# EAGLE board v1draft2 (EAGLE 7.3.0)
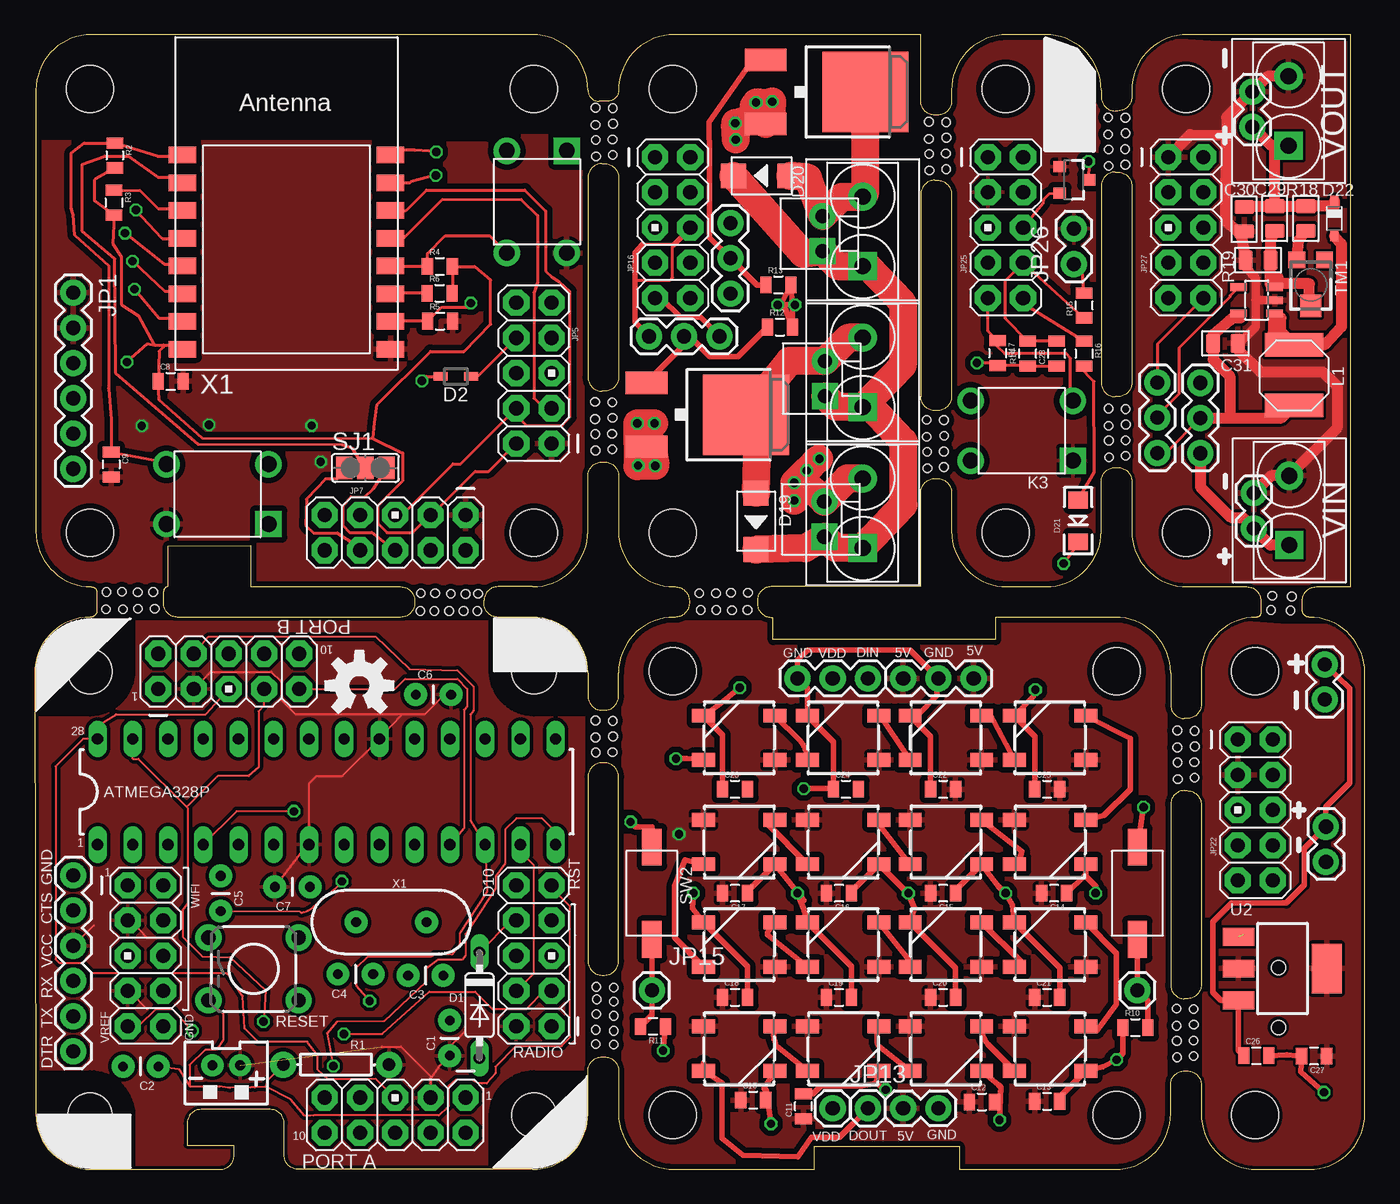
[diagram p0: board, top side]
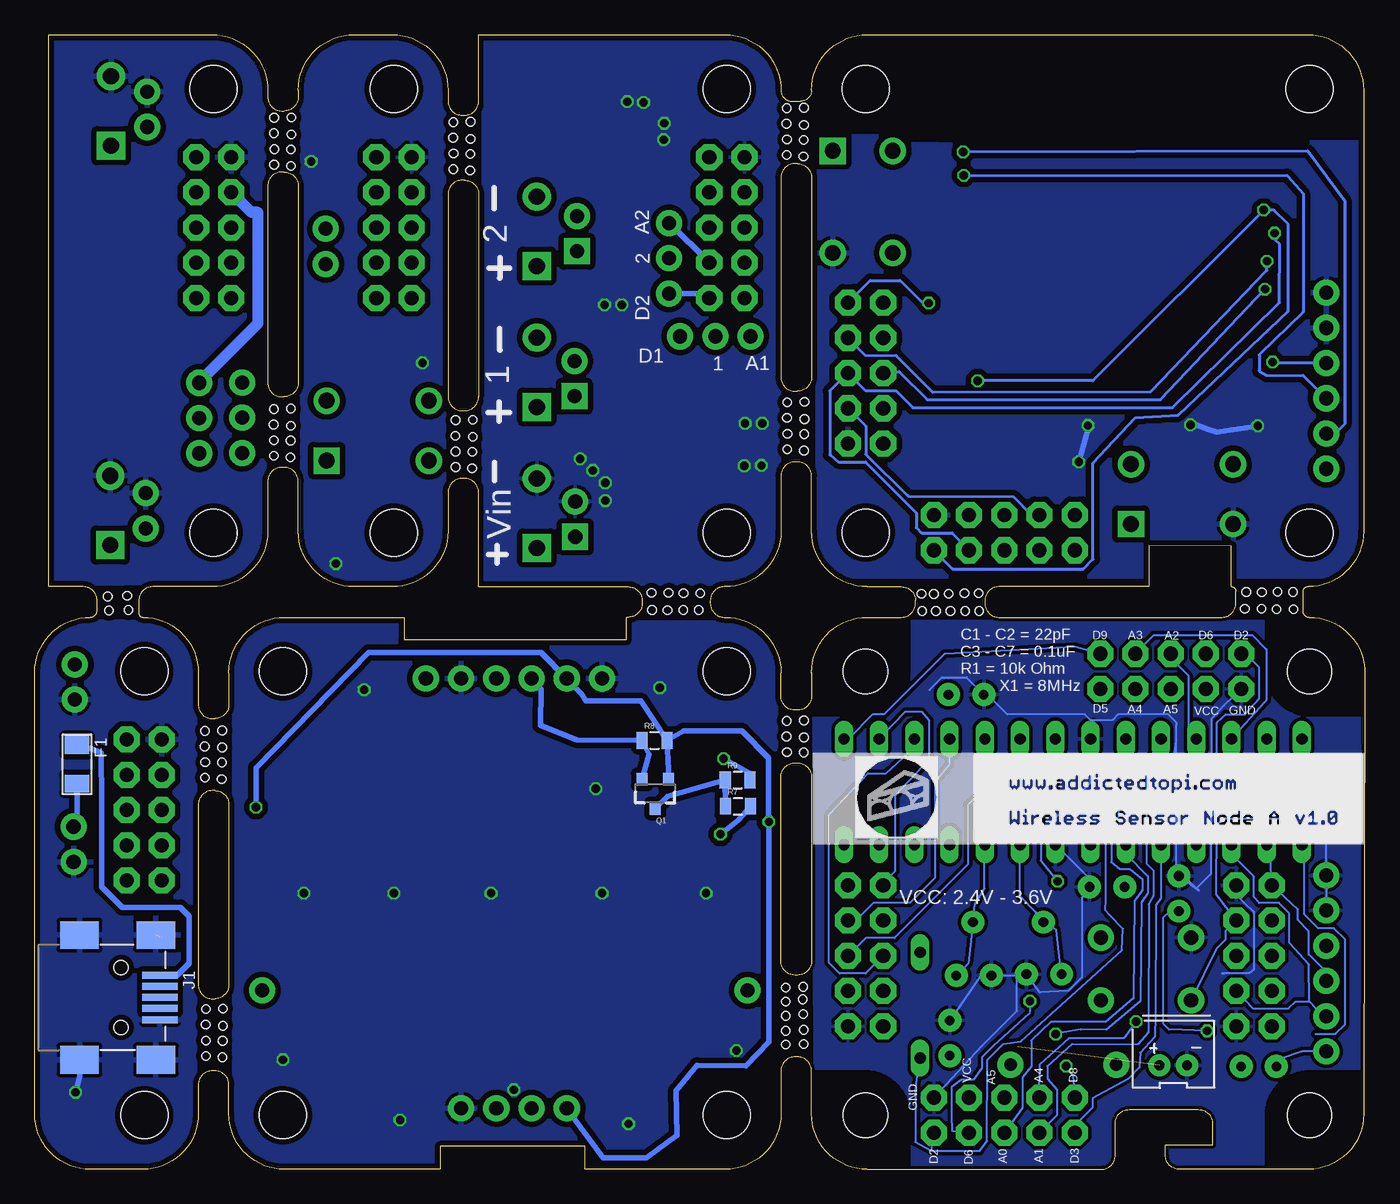
[diagram p1: board, bottom side, seen from below]

Size 95.89 x 81.8 mm. Coordinates in mm from the lower left corner, seen from the top.
Outline: 0.09,77.8 0.09,46 arc90 4.09,42 arc-90 4.49,41.6 4.49,40.29 arc-90 4,39.8 arc90 0,35.79 0.08,3.99 arc90 4.08,0 13.37,0 arc90 14.37,1 14.37,1.74 10.99,1.74 10.99,3.31 arc-90 11.99,4.31 16.99,4.31 arc-90 17.99,3.31 17.99,1 arc90 18.99,0 35.89,0 arc90 39.89,4 39.89,7.1 arc-90 40.89,8.1 41.09,8.1 arc-90 42.09,7.1 42.09,4 arc90 46.09,0 56.2,0.01 56.2,1.66 66.65,1.65 66.65,0 77.89,0 arc90 81.89,4 81.89,6.1 arc-90 82.89,7.1 83.09,7.1 arc-90 84.09,6.1 84.09,4 arc90 88.09,0 91.89,0 arc90 95.89,4 95.89,35.8 arc90 91.89,39.8 arc-90 91.39,40.3 91.39,41 arc-90 92.39,42 94.89,42 94.89,81.8 83.09,81.8 arc90 79.09,77.8 79.09,77.3 arc-90 78.09,76.3 77.89,76.3 arc-90 76.89,77.3 76.89,77.8 arc90 72.89,81.8 70.09,81.8 arc90 66.09,77.8 66.09,77 arc-90 65.09,76 64.89,76 arc-90 63.89,77 63.89,81.8 46.09,81.8 arc90 42.09,77.8 arc-90 41.29,77 40.69,77 arc-90 39.89,77.8 arc90 35.89,81.8 4.09,81.8 arc90 0.09,77.8
Outline: 9.63,42 arc90 9.29,41.66 9.29,40.8 arc90 10.29,39.8 26.39,39.8 arc90 27.39,40.8 27.39,41 arc90 26.39,42 15.56,42 15.56,44.96 9.63,44.93 9.63,42
Outline: 35.89,42 33.39,42 arc90 32.39,41 32.39,40.8 arc90 33.39,39.8 35.89,39.8 arc-90 39.89,35.8 39.89,34.1 arc90 40.89,33.1 41.09,33.1 arc90 42.09,34.1 42.09,35.8 arc-90 46.09,39.8 46.19,39.8 arc90 47.19,40.8 47.19,41 arc90 46.19,42 46.09,42 arc-90 42.09,46 42.09,50 arc90 41.09,51 40.89,51 arc90 39.89,50 39.89,46 arc-90 35.89,42
Outline: 40.89,72.5 41.09,72.5 arc-90 42.09,71.5 42.09,57.1 arc-90 41.09,56.1 40.89,56.1 arc-90 39.89,57.1 39.89,71.5 arc-90 40.89,72.5
Outline: 40.89,14 41.09,14 arc90 42.09,15 42.09,28.3 arc90 41.09,29.3 40.89,29.3 arc90 39.89,28.3 39.89,15 arc90 40.89,14
Outline: 82.89,27.3 83.09,27.3 arc-90 84.09,26.3 84.09,13.3 arc-90 83.09,12.3 82.89,12.3 arc-90 81.89,13.3 81.89,26.3 arc-90 82.89,27.3
Outline: 81.89,35.8 81.89,33.5 arc90 82.89,32.5 83.09,32.5 arc90 84.09,33.5 84.09,35.8 arc-90 88.09,39.8 arc90 88.39,40.1 88.39,41 arc90 87.39,42 83.09,42 arc-90 79.09,46 79.09,49.6 arc90 78.09,50.6 77.89,50.6 arc90 76.89,49.6 76.89,46 arc-90 72.89,42 70.09,42 arc-90 66.09,46 66.09,48.8 arc90 65.09,49.8 64.89,49.8 arc90 63.89,48.8 63.89,42 53.09,42 arc90 52.09,41 52.09,40.8 arc90 53.09,39.8 53.24,39.8 53.24,38.18 69.27,38.18 69.27,39.8 77.89,39.8 arc-90 81.89,35.8
Outline: 65.09,54.7 64.89,54.7 arc-90 63.89,55.7 63.89,70.3 arc-90 64.89,71.3 65.09,71.3 arc-90 66.09,70.3 66.09,55.7 arc-90 65.09,54.7
Outline: 77.89,71.9 78.09,71.9 arc-90 79.09,70.9 79.09,56.7 arc-90 78.09,55.7 77.89,55.7 arc-90 76.89,56.7 76.89,70.9 arc-90 77.89,71.9
Copper layers (1*16): Top 0.035mm / dielectric 1.5mm / Bottom 0.035mm
Design rules "dirt_cheap_dirty_boards.v1": minimum track width 5mil, minimum drill 12mil, track to track 5mil, track to pad 5mil, pad to pad 5mil, via to via 5mil, smd to smd 0mil, copper to edge 10mil, drill to drill 10mil, minimum pad ring 10mil, minimum via ring 6mil, stop-mask expansion 2mil, vias tented up to drill 25mil, thermal gap 10mil
Net classes: 0 default: clearance 0.205 mm
Holes 3.4 mm at 3.99,45.9 35.99,77.9 35.99,45.9 3.99,77.9 45.99,3.9 45.99,35.9 77.99,35.9 77.99,3.9 45.99,77.9 45.99,45.9 87.99,35.9 87.99,3.9 69.99,77.9 69.99,45.9 82.99,77.9 82.99,45.9
Holes 0.6 mm at 5.17,41.62 6.29,41.64 7.43,41.61 8.55,41.62 5.14,40.38 6.37,40.38 7.45,40.41 8.65,40.42 27.84,41.53 28.87,41.53 30.01,41.5 31.07,41.47 31.97,41.5 27.81,40.25 28.81,40.25 29.88,40.25 30.92,40.25 31.92,40.25 40.46,9.02 40.46,10.05 40.49,11.19 40.52,12.25 40.49,13.15 41.74,8.99 41.74,9.99 41.74,11.06 41.74,12.1 41.74,13.1 51.39,40.32 50.27,40.3 49.13,40.33 48.01,40.32 51.42,41.56 50.19,41.56 49.11,41.53 47.91,41.52 41.63,55.29 41.65,54.17 41.62,53.03 41.63,51.91 40.39,55.32 40.39,54.09 40.42,53.01 40.43,51.81 41.67,76.5 41.69,75.38 41.66,74.24 41.67,73.12 40.43,76.53 40.43,75.3 40.46,74.22 40.47,73.02 65.7,75.49 65.72,74.37 65.69,73.23 65.7,72.11 64.46,75.52 64.46,74.29 64.49,73.21 64.5,72.01 78.62,75.81 78.64,74.69 78.61,73.55 78.62,72.43 77.38,75.84 77.38,74.61 77.41,73.53 77.42,72.33 78.65,54.81 78.67,53.69 78.64,52.55 78.65,51.43 77.41,54.84 77.41,53.61 77.44,52.53 77.45,51.33 65.55,54.01 65.57,52.89 65.54,51.75 65.55,50.63 64.31,54.04 64.31,52.81 64.34,51.73 64.35,50.53 83.55,11.55 83.57,10.43 83.54,9.29 83.55,8.17 82.31,11.58 82.31,10.35 82.34,9.27 82.35,8.07 83.61,31.61 83.63,30.49 83.6,29.35 83.61,28.23 82.37,31.64 82.37,30.41 82.4,29.33 82.41,28.13 41.67,32.33 41.69,31.21 41.66,30.07 40.43,32.36 40.43,31.13 40.46,30.05 89.13,40.32 90.53,40.28 90.62,41.3 89.22,41.36
tRestrict: 16 lines
bRestrict: 16 lines

## Footprints (pad centres in the part's own frame; a part is rotated, then mirrored left to right if it is on the bottom)
CAP-PTH-SMALL = drill 0.7 pad 1.651: 1 0,0; 2 2.54,0
0805 = smd 0.8 x 1.2: 1 -0.9,0; 2 0.9,0
C0805 = smd 1.397 x 1.016: 1 0,0.889; 2 0,-0.889
DO35-7 = drill 0.813 long: A 3.81,0; C -3.81,0
SOD323 = smd 1 x 0.6: 1 -1.1,0; 2 1.1,0
WS2812B = smd 1.651 x 1: 1 -2.577,1.6; 2 -2.577,-1.6; 3 2.577,-1.6; 4 2.577,1.6
DO-214AC = smd 1.8 x 1.77: 1 -2.042,0; 2 2.042,0
LED-1206 = smd 1.2 x 1.4: A -1.5,0; C 1.5,0
SOD323_ST = smd 0.8 x 0.6: A 1.25,0; C -1.25,0
F1206 = smd 1.27 x 1.778: 1 -1.397,0; 2 1.397,0
SOT-23-5 = smd 0.55 x 1.2: 1 -0.95,-1.3; 2 0,-1.3; 3 0.95,-1.3; 4 0.95,1.3; 5 -0.95,1.3
MINIUSB5+4P-SMD-0.8-90D = smd 2.54 x 0.508: 1 0.381,-1.6; 2 0.381,-0.8; 3 0.381,0; 4 0.381,0.8; 5 0.381,1.6 | smd 2.794 x 2: P$1 6.175,4.5; P$2 6.175,-4.5; P$3 0.675,4.5; P$4 0.675,-4.5 | hole 1.016: 3.175,-2.159; 3.175,2.159
1X06 = drill 1.016 pad 1.88: 1 0,0; 2 2.54,0; 3 5.08,0; 4 7.62,0; 5 10.16,0; 6 12.7,0
AVR_ICSP = drill 1.016 pad 1.88 octagon: 1 -1.27,5.08; 2 1.27,5.08; 3 -1.27,2.54; 4 1.27,2.54; 5 -1.27,0; 6 1.27,0; 7 -1.27,-2.54; 8 1.27,-2.54; 9 -1.27,-5.08; 10 1.27,-5.08
JST-2-PTH-VERT = drill 0.7 pad 1.6: 1 -1,-0.55; 2 1,-0.55
1X03 = drill 1.016 pad 1.88: 1 0,0; 2 2.54,0; 3 5.08,0
1X01 = drill 1.016 pad 1.88: 1 0,0
1X02 = drill 1.016 pad 1.88: 1 0,0; 2 2.54,0
MOLEX-1X2 = drill 1.016 pad 1.88 square: 1 0,0 | drill 1.016 pad 1.88: 2 2.54,0
SW4-6.0X6.0X5.0MM = drill 1.143 pad 1.905 square: 1 -3.683,2.159 | drill 1.143 pad 1.905: 2 -3.683,-2.159; 3 3.683,-2.159; 4 3.683,2.159
SMD-2P-5.0X5.0X2.0MM = smd 4.2 x 1.7: 1 0,2.175; 2 0,-2.175
SOT23-3 = smd 0.8 x 0.9: 1 -0.95,-1; 2 0.95,-1; 3 0,1.1
DPAK = smd 3 x 1.6: 1 0,-2.3; 2 0,2.3 | smd 6.2 x 5.8: 3 -7.18,0
AXIAL-0.3 = drill 0.9 pad 1.88: P$1 -3.81,0; P$2 3.81,0
R0805 = smd 1.397 x 1.016: 1 0,0.889; 2 0,-0.889
TACTILE-PTH = drill 1.016 pad 1.88: 1 -3.251,2.261; 2 3.251,2.261; 3 -3.251,-2.261; 4 3.251,-2.261
PAD-JUMPER-3-NO_YES_SILK_FULL_BOX = smd 1.168 x 1.6: 1 -1.524,0; 2 0,0; 3 1.524,0
SW2-4.0-6.0X3.0X2.5MM = smd 2.65 x 1.4: 1 -3.325,0; 2 3.325,0
TC33X = smd 1.2 x 1.2: 1 -1,-1.825; 3 1,-1.825 | smd 1.5 x 1.6: 2 0,1.5
DIL28-3 = drill 0.813 long: 1 -16.51,-3.81; 2 -13.97,-3.81; 3 -11.43,-3.81; 4 -8.89,-3.81; 5 -6.35,-3.81; 6 -3.81,-3.81; 7 -1.27,-3.81; 8 1.27,-3.81; 9 3.81,-3.81; 10 6.35,-3.81; 11 8.89,-3.81; 12 11.43,-3.81; 13 13.97,-3.81; 14 16.51,-3.81; 15 16.51,3.81; 16 13.97,3.81; 17 11.43,3.81; 18 8.89,3.81; 19 6.35,3.81; 20 3.81,3.81; 21 1.27,3.81; 22 -1.27,3.81; 23 -3.81,3.81; 24 -6.35,3.81; 25 -8.89,3.81; 26 -11.43,3.81; 27 -13.97,3.81; 28 -16.51,3.81
SOT-223 = smd 1.27 x 2.286: 1 -2.286,-3.175; 2 0,-3.175; 3 2.286,-3.175 | smd 3.556 x 2.159: TER 0,3.175
DP4040_V1_NOLINES = hole 3.2: -16,-16; 16,-16; 16,16; -16,16
H2-5.0-10.5X8.0MM = drill 1.168 pad 2.032 square: 1 0,2.5 | drill 1.168 pad 2.032: 2 0,-2.5
ESP-12 = smd 2 x 1.2: 1 -7.5,4.5; 2 -7.5,2.5; 3 -7.5,0.5; 4 -7.5,-1.5; 5 -7.5,-3.5; 6 -7.5,-5.5; 7 -7.5,-7.5; 8 -7.5,-9.5; 9 7.5,-9.5; 10 7.5,-7.5; 11 7.5,-5.5; 12 7.5,-3.5; 13 7.5,-1.5; 14 7.5,0.5; 15 7.5,2.5; 16 7.5,4.5
HC49US = drill 0.7 pad 1.651: 1 -2.54,0; 2 2.54,0

## Placement (x,y rotation side)
C1  [CAP-PTH-SMALL]  29.45,13.97 180 top
C2  [CAP-PTH-SMALL]  21.86,14.07 0 top
C3  [CAP-PTH-SMALL]  29.92,8.19 90 top
C4  [CAP-PTH-SMALL]  8.91,7.41 180 top
C5  [CAP-PTH-SMALL]  13.41,18.61 90 top
C6  [CAP-PTH-SMALL]  30.02,34.22 180 top
C7  [CAP-PTH-SMALL]  17.31,20.37 0 top
C8  [0805]  9.81,56.81 0 top
C9  [0805]  5.52,50.82 270 top
C10  [0805]  51.8,4.99 0 top
C11  [0805]  55.42,4.54 90 top
C12  [0805]  68.29,4.86 0 top
C13  [0805]  72.99,4.9 0 top
C14  [0805]  73.49,19.9 180 top
C15  [0805]  65.49,19.9 180 top
C16  [0805]  57.99,19.9 180 top
C17  [0805]  50.49,19.9 180 top
C18  [0805]  50.49,12.4 0 top
C19  [0805]  57.99,12.4 0 top
C20  [0805]  65.49,12.4 0 top
C21  [0805]  72.99,12.4 0 top
C22  [0805]  65.49,27.4 0 top
C23  [0805]  50.49,27.4 0 top
C24  [0805]  58.49,27.4 0 top
C25  [0805]  72.99,27.4 0 top
C26  [0805]  88.06,8.19 0 top
C27  [0805]  92.23,8.16 180 top
C28  [0805]  73.67,58.8 90 top
C29  1uf  [C0805]  89.39,68.55 180 top
C30  1uf  [C0805]  87.19,68.5 180 top
C31  1uf  [C0805]  85.84,59.55 270 top
D1  1N4148DO35-7  [DO35-7]  32.06,11.83 270 top
D2  [SOD323]  30.36,57.16 180 top
D3  [WS2812B]  50.79,23.6 0 top
D4  [WS2812B]  58.29,23.6 0 top
D5  [WS2812B]  65.69,23.6 0 top
D6  [WS2812B]  73.19,23.6 0 top
D7  [WS2812B]  73.19,16.2 180 top
D8  [WS2812B]  65.69,16.2 180 top
D9  [WS2812B]  58.29,16.2 180 top
D10  [WS2812B]  58.29,8.7 0 top
D11  [WS2812B]  65.69,8.7 0 top
D12  [WS2812B]  73.19,8.7 0 top
D13  [WS2812B]  73.19,31.1 180 top
D14  [WS2812B]  65.69,31.1 180 top
D15  [WS2812B]  58.29,31.1 180 top
D16  [WS2812B]  50.79,31.1 180 top
D17  [WS2812B]  50.79,16.2 180 top
D18  [WS2812B]  50.79,8.7 0 top
D19  DIODE-GEN-PURPOSE-1KV-1A(DO-214AC)  [DO-214AC]  52,46.72 270 top
D20  DIODE-GEN-PURPOSE-1KV-1A(DO-214AC)  [DO-214AC]  52.41,71.63 180 top
D21  [LED-1206]  75.22,46.75 270 top
D22  BAT60J  [SOD323_ST]  93.69,68.55 270 top
F1  500MA  [F1206]  92.84,29.2 270 bottom
IC1  IC_FAN5331-SOT-23-5  [SOT-23-5]  88.09,62.65 90 top
J1  [MINIUSB5+4P-SMD-0.8-90D]  86.48,12.39 180 bottom
JP1  [1X06]  2.79,63.2 270 top
JP2  M05X2PTH  [AVR_ICSP]  13.99,35.9 90 top
JP3  M05X2PTH  [AVR_ICSP]  25.99,3.9 270 top
JP4  [1X06]  2.79,21.2 270 top
JP5  [AVR_ICSP]  35.99,57.4 180 top
JP6  M02JST-PTH-VERT  [JST-2-PTH-VERT]  13.82,6.95 180 top
JP7  [AVR_ICSP]  25.99,45.9 270 top
JP8  M05X2PTH  [AVR_ICSP]  7.99,15.4 0 top
JP9  [1X03]  54.99,35.4 0 top
JP10  [1X01]  60.07,4.4 0 top
JP11  [1X02]  65.15,4.4 180 top
JP12  [1X03]  62.61,35.4 0 top
JP13  [1X01]  57.53,4.4 0 top
JP14  [1X01]  79.49,12.9 0 top
JP15  [1X01]  44.49,12.9 0 top
JP16  [AVR_ICSP]  45.99,67.9 0 top
JP17  [MOLEX-1X2]  56.98,55.74 90 top
JP18  [MOLEX-1X2]  56.8,66.19 90 top
JP19  [MOLEX-1X2]  56.92,45.6 90 top
JP20  [1X03]  49.36,60.05 180 top
JP21  [1X03]  50.15,68.22 270 top
JP22  [AVR_ICSP]  87.99,25.9 0 top
JP23  [1X02]  93.09,24.7 270 top
JP24  [1X02]  92.99,36.4 270 top
JP25  [AVR_ICSP]  69.99,67.9 0 top
JP26  [1X02]  74.92,65.27 90 top
JP27  [AVR_ICSP]  82.99,67.9 0 top
JP28  [1X02]  87.79,75.15 90 top
JP29  [1X02]  87.89,46.2 90 top
JP30  [1X03]  80.94,51.65 90 top
JP31  [1X03]  84.04,56.7 270 top
K1  TS-1109  [SW4-6.0X6.0X5.0MM]  36.2,69.75 270 top
K2  TS-1109  [SW4-6.0X6.0X5.0MM]  13.18,48.68 180 top
K3  TS-1109  [SW4-6.0X6.0X5.0MM]  71.16,53.25 180 top
L1  200UH  [SMD-2P-5.0X5.0X2.0MM]  90.79,57.25 0 top
Q1  200mA/50V  [SOT23-3]  51.16,27.11 180 bottom
Q2  40V 51A  [DPAK]  44.11,54.4 180 top
Q3  40V 51A  [DPAK]  52.7,77.67 180 top
R1  [AXIAL-0.3]  21.73,7.55 180 top
R2  [0805]  5.78,73.09 270 top
R3  [0805]  5.72,69.68 270 top
R4  [0805]  29.21,65.09 0 top
R5  [0805]  29.22,61.15 0 top
R6  [0805]  29.2,63.16 0 top
R7  [0805]  45.19,26.17 0 bottom
R8  [0805]  51.2,30.92 0 bottom
R9  [0805]  45.21,28.07 0 bottom
R10  [0805]  79.35,10.22 0 top
R11  [0805]  44.57,10.3 180 top
R12  [0805]  53.73,60.72 0 top
R13  [0805]  53.61,63.76 0 top
R14  [0805]  71.58,58.81 90 top
R15  [0805]  75.65,62.28 90 top
R16  [0805]  75.65,58.8 270 top
R17  [0805]  69.42,58.84 270 top
R18  [R0805]  91.64,68.55 180 top
R19  [R0805]  88.19,65.55 90 top
RESET  SWITCH-MOMENTARY-2PTH  [TACTILE-PTH]  15.77,14.44 0 top
RF24  M05X2PTH  [AVR_ICSP]  35.99,15.4 180 top
SJ1  JUMPER-PAD-3-NOYES_SILK  [PAD-JUMPER-3-NO_YES_SILK_FULL_BOX]  23.84,50.57 0 top
SW1  [SW2-4.0-6.0X3.0X2.5MM]  79.49,19.9 270 top
SW2  [SW2-4.0-6.0X3.0X2.5MM]  44.49,19.9 270 top
TM1  [TC33X]  91.99,63.75 180 top
U1  ATMEGA328P_PDIP  [DIL28-3]  21.04,27.22 0 top
U2  PMIC-CJT1117-3.3(SOT223)  [SOT-223]  89.96,14.47 270 top
U$1  [DP4040_V1_NOLINES]  19.99,19.9 0 top
U$2  2p-5.08  [H2-5.0-10.5X8.0MM]  59.69,57.46 180 top
U$3  2p-5.08  [H2-5.0-10.5X8.0MM]  59.69,67.62 180 top
U$4  2p-5.08  [H2-5.0-10.5X8.0MM]  59.69,47.3 180 top
U$5  [PI]  30.65,23.8 0 top
U$6  [OSHW-LOGO-M]  23.41,34.88 0 top
U$7  MCP9700SMD  [SOT23-3]  74.9,71.33 270 top
U$8  2p-5.08  [H2-5.0-10.5X8.0MM]  90.39,76.3 180 top
U$9  2p-5.08  [H2-5.0-10.5X8.0MM]  90.44,47.5 180 top
X1  [ESP-12]  18.15,68.62 0 top
Y1  [HC49US]  25.71,17.82 180 top

## Library data of the parts
C1-C7 R1-R17 SJ1 = SparkFun-Passives
C8-C28 = SparkFun-Capacitors
C29-C31 = Seeed-OPL-Capacitor; MPN: CC0805KKX7R8BB105
D1 D22 = diode
D2 = zetex; MPN: CDSOD323-T05C; OC_FARNELL: 1824860; OC_NEWARK: 79R6078
D3-D18 = SparkFun-LED; PROD_ID: DIO-12503
D19 D20 = Seeed-OPL-Diode; MPN: 1N4007
D21 = SparkFun-LED
F1 = Seeed-OPL-fuse
IC1 = dp_devices
J1 = Seeed-OPL-Connector; MPN: ST-USB-002A
JP1 JP4 = SparkFun-Connectors; PROD_ID: CONN-08437
JP2 JP3 JP5-JP31 RF24 = SparkFun-Connectors
K1-K3 = Seeed-OPL-Button
L1 = Seeed-OPL-Inductor; MPN: SWPA5020S220MT
Q1 = SparkFun-DiscreteSemi; PROD_ID: TRANS-00830
Q2 Q3 = Seeed-OPL-Transistor; MPN: NTD5805NT4G
R18 R19 = Seeed-OPL-Resistor
RESET = SparkFun-Electromechanical
SW1 SW2 = Seeed-OPL-Switch
TM1 X1 = adafruit
U1 = SparkFun-DigitalIC
U2 = Seeed-OPL-ic; MPN: CJT1117-3.3
U$1 = dp_devices_mod
U$2-U$4 U$8 U$9 = Seeed-OPL-Connector; MPN: GS009S-2P-2
U$5 = mystuff
U$6 = SparkFun-Aesthetics
U$7 = SparkFun-Sensors; PROD_ID: IC-08917
Y1 = SparkFun-FreqCtrl

## Nets
3.3V: JP9.2 JP13.1 Q1.1 R8.2 SW1.1 SW2.1
ADC: SJ1.2 X1.2
DIN: JP9.3 Q1.2 R8.1
GND: C1.2 C2.2 C3.2 C5.2 C6.2 C7.2 JP2.1 JP3.1 JP4.1 JP4.2 JP6.2 JP8.2 JP8.10 RESET.1 RF24.1 U1.8 U1.22
GND1: C8.2 C9.2 JP1.1 JP1.2 JP5.1 JP7.1 K1.4 K2.4 R5.2 X1.9
GND2: JP16.1 JP19.2 Q2.2 Q3.2 R12.2 R13.2 U$4.2
GND3: C26.2 C27.2 J1.5 J1.P$1 J1.P$2 J1.P$3 J1.P$4 JP22.1 JP23.2 JP24.2 U2.1
GND4: C28.1 D21.C JP25.1 R14.1 R17.2 U$7.3
GND5: C30.1 C31.1 IC1.2 JP27.1 JP28.2 JP29.2 R19.1 U$8.2 U$9.2
GPIO0: K1.3 R4.1 X1.12
GPIO2: R6.1 X1.11
GPIO4: JP5.3 JP7.7 X1.13
GPIO5: JP5.4 JP7.5 X1.14
GPIO12: JP7.9
GPIO13: JP7.10
GPIO14: JP5.5 JP7.4 X1.5
GPIO16: D2.2 JP7.2 X1.4
N$1: C2.1 U1.9 Y1.2
N$2: C4.1 JP8.4 R1.P$2 RESET.3 RF24.9 U1.1
N$3: C1.1 U1.10 Y1.1
N$4: RF24.10 U1.16
N$5: JP2.4 JP3.4 U1.12
N$6: C5.1 JP8.9 U1.21
N$7: JP1.5 X1.16
N$8: JP1.4 X1.15
N$9: JP3.9 U1.14
N$10: D1.A JP2.2 JP3.2 U1.4
N$11: JP3.6 U1.23
N$12: JP3.8 U1.24
N$13: C4.2 JP4.6
N$14: JP2.6 U1.25
N$15: JP2.8 U1.26
N$16: RF24.6 U1.17
N$17: JP3.10 U1.5
N$18: JP4.5 JP8.8 U1.3
N$19: JP4.4 JP8.1 U1.2
N$20: RF24.4 U1.13
N$21: JP2.5 JP3.5 U1.28
N$22: JP2.7 JP3.7 U1.27
N$23: RF24.5 U1.19
N$24: D1.C RF24.8
N$25: RF24.3 U1.6
N$26: RF24.7 U1.18
N$27: JP2.10 U1.15
N$28: JP2.9 U1.11
N$29: JP5.7 X1.6
N$30: JP5.6 X1.7
N$31: JP7.6 SJ1.3
N$32: JP7.8 SJ1.1
N$33: D2.1 JP5.8
N$34: C9.1 K2.3 R2.1 X1.1
N$35: R3.1 X1.3
N$36: D5.4 D6.2
N$37: D4.4 D5.2
N$38: D3.4 D4.2
N$39: D11.4 D12.2
N$40: D10.4 D11.2
N$41: D10.2 D18.4
N$42: D6.4 D13.2
N$43: D7.2 D12.4
N$44: D3.2 D17.4
N$45: D9.4 D17.2
N$46: D8.4 D9.2
N$47: D7.4 D8.2
N$48: D15.4 D16.2
N$49: D14.4 D15.2
N$50: D13.4 D14.2
N$51: D16.4 R9.2
N$52: D18.2 JP10.1
N$53: Q1.3 R7.1 R9.1
N$54: JP14.1 R10.2 SW1.2
N$55: JP15.1 R11.2 SW2.2
N$56: D19.2 D20.2 JP17.1 JP18.1 JP19.1 U$2.1 U$3.1 U$4.1
N$57: D20.1 JP18.2 Q3.3 U$3.2
N$58: D19.1 JP17.2 Q2.3 U$2.2
N$59: JP20.2 Q2.1 R12.1
N$60: JP21.2 Q3.1 R13.1
N$61: JP16.9 JP20.1
N$62: JP16.10 JP21.3
N$63: JP16.6 JP20.3
N$64: JP16.8 JP21.1
N$65: C26.1 F1.2 JP23.1 JP24.1 U2.3
N$66: F1.1 J1.1
N$67: JP25.9 K3.2 R17.1
N$68: D21.A R16.2
N$69: JP25.10 R16.1
N$70: JP25.6 U$7.2
N$71: C28.2 JP25.8 R14.2 R15.1
N$72: JP26.1 R15.2
N$73: JP27.3 JP31.1
N$74: C31.2 IC1.5 JP30.1 JP31.2 L1.2
N$75: IC1.4 JP30.2
N$76: JP27.10 JP30.3
N$77: D22.A IC1.1 L1.1
N$78: C29.2 C30.2 D22.C JP28.1 R18.2 U$8.1
N$79: C29.1 IC1.3 R19.2 TM1.2
N$80: JP29.1 JP31.3 U$9.1
N$81: R18.1 TM1.3
SPI_CS: JP5.9 R5.1 X1.10
VCC: C3.1 C6.1 C7.1 JP2.3 JP3.3 JP4.3 JP6.1 JP8.3 JP8.7 R1.P$1 RF24.2 U1.7 U1.20
VCC1: C8.1 JP1.3 JP5.2 JP7.3 R2.2 R3.2 R4.2 R6.2 X1.8
VDD: C10.1 C11.1 C12.1 C13.1 C14.2 C15.2 C16.2 C17.2 C18.1 C19.1 C20.1 C21.1 C22.2 C25.2 D3.1 D4.1 D5.1 D6.1 D7.1 D8.1 D9.1 D10.1 D11.1 D12.1 D13.1 D14.1 D15.1 D16.1 D17.1 D18.1 JP11.2 JP12.1 JP12.3 R7.2
VDD1: C27.1 JP22.3 U2.2 U2.TER
VDD2: JP25.3 JP26.2 K3.1 U$7.1
VSS: C10.2 C11.2 C12.2 C13.2 C14.1 C15.1 C16.1 C17.1 C18.2 C19.2 C20.2 C21.2 C22.1 C23.1 C24.1 C25.1 D3.3 D4.3 D5.3 D6.3 D7.3 D8.3 D9.3 D10.3 D11.3 D12.3 D13.3 D14.3 D15.3 D16.3 D17.3 D18.3 JP9.1 JP11.1 JP12.2 R10.1 R11.1

## Tracks (layer width: path | path; a pad name or v marks a point on that pad's centre or on a via)
3.3V  (via drill 0.6)
  Top 0.4: SW1.1 79.69,24.58 v79.93,26.11 | SW2.1 44.49,24.7 43.31,24.7 v42.96,25.05
  Bottom 0.4: R8.2 50.21,28.83 Q1.1 | R8.2 52.18,33.75 56.13,33.77 56.48,34.26 JP9.2 59.39,37.26 71.81,37.26 79.93,28.92 v79.93,26.11 | R8.2 49.11,31.6 44.91,31.59 42.98,29.66 42.98,25.07 v42.96,25.05 42.96,9.2 44.6,7.46 48.14,7.5 49.64,5.66 49.6,2.44 51.8,0.82 54.9,0.82 JP13.1
ADC
  Top 0.2: SJ1.2 23.41,51.15 22.91,51.95 22.16,52.23 11.82,52.26 5.84,57.42 5.78,65.64 3.44,67.63 3.44,72.45 5.04,73.05 6.73,73.05 8.87,71.53 10.24,71.53 X1.2
DIN
  Bottom 0.4: Q1.2 51.61,29.91 R8.1 56.79,30.97 59.43,31.99 59.37,34.62 JP9.3
GND
  Bottom 0.152: C2.2 23.41,12.75 21.38,12.88 20.38,13.82 20.41,19.58 20.08,20.13 C7.2 19.47,20.57 U1.8 22.34,23.44 22.34,25.3 19.77,27.87 U1.22 19.8,31.06 19.8,32.41 | JP4.2 JP4.1 2.79,24.24 4.43,25.88 10.84,25.88 10.96,25.76 10.96,25.55 11.09,25.4 11.09,21.29 12.13,20.27 | 19.8,32.41 20.21,32.82 25.8,32.82 27.2,34.22 C6.2 28.71,35.46 30.47,35.46 31.38,34.55 | C2.2 24.78,13.97 C1.2 27.68,13.97 C3.2 | JP3.1 27.59,8.9 25.07,11.42 25.07,13.68 C2.2 | 12.13,20.27 11.96,20.1 11.98,20.08 C5.2 | 12.13,20.27 13.6,21.74 13.59,30.89 | 13.59,30.89 13.6,32 13.6,32.2 14.21,32.82 17.77,32.82 18.18,32.41 19.8,32.41 | JP2.1 10.15,33.43 11.06,32.48 11.06,29.87 11.78,29.16 12.79,29.16 13.69,30.06 13.59,30.89 | JP8.2 9.39,19.84 7.99,18.57 8,14.39 8.32,14.13 10.3,14.12 10.15,14.12
  pour Bottom (isolate 0.254): 3.04,39.52 36.57,39.52 39.77,35.92 39.72,3.71 35.91,0.08 3.5,0.08 0.22,4.47 0.32,35.89
GND1  (via drill 0.6)
  Bottom 0.4: v20.62,51 19.91,53.57 v19.96,53.62 | 12.11,53.66 11.36,53.35 10.67,53.15 v7.72,53.6
  other vias: 12.57,53.67
  pour Top (isolate 0.4): 0.39,81.42 39.47,81.42 39.47,42.3 0.52,42.3 0.52,62.09
  pour Bottom (isolate 0.4): 0.31,81.39 39.44,81.39 39.44,42.77 0.63,42.77 0.63,62.64
GND2  (via drill 0.6)
  Top 0.4: v54.81,62.33 53.8,62.39 R13.2 54.63,62.22 R12.2 54.01,62.25 v53.57,62.33
  Top 2: Q2.2 44.45,52.46 v44.74,50.72 | v44.68,53.78 v43.44,53.78 43.45,50.69 v44.74,50.72 | v44.74,50.72 v43.5,50.74 | v50.55,74.23 v50.5,75.42 53.15,76.37 v53.17,76.97 | v53.17,76.97 52.75,76.83 v52,76.92 | v53.17,76.97 51.84,76.66 Q3.2 | U$4.2 58.58,49.8 JP19.2 55.17,49.88 55.17,49.91 | v56.57,51.23 56.51,51.23 v55.66,50.38 55.64,50.38 55.17,49.91 | 55.17,49.91 v54.76,49.5 v54.75,49.49 v54.75,48.21
  pour Bottom (isolate 0.4): 63.58,81.6 63.58,42.21 42.15,42.21 42.15,81.58 52.64,81.58
GND3  (via drill 0.6)  (1 unrouted)
  Top 0.4: C26.2 90.26,8.24 C27.2 91.29,7.02 v92.94,5.55
  Bottom 0.4: v92.94,5.55 92.63,6.69 J1.P$1
  pour Bottom (isolate 0.4): 84.34,39.65 84.34,0.35 95.39,0.35 95.39,39.45 90.19,39.45
GND4  (via drill 0.6)
  Top 0.2: D21.C 75.42,45.33 v74.18,43.67 | U$7.3 76.03,72.52 v75.96,72.66 | C28.1 R14.1 71.55,57.94 R17.2 69.23,58.13 v67.93,58.13
  pour Bottom (isolate 0.4): 76.69,81.7 76.69,42.2 66.29,42.2 66.29,81.6 69.59,81.6
GND5
  Top 0.6: IC1.2 87.99,62.65 | 87.99,62.65 88.04,62.7 88.04,64.25 87.3,64.99 R19.1 | 87.99,62.65 88.04,62.6 88.04,60.75 86.84,59.55 C31.1
  Top 0.8: U$8.2 88.9,78.8 JP28.2 85.94,75.84 85.94,74.6 85.86,74.54 | JP29.2 89.15,50 U$9.2 93.89,53.45 93.89,56.45 92.84,57.5 88.34,57.5 86.84,59 86.84,59.55 | 85.86,74.54 85.84,68.4 86.73,67.61 | 86.73,67.61 C30.1 | 86.73,67.61 86.95,67.39 R19.1 | JP27.1 83.31,74.59 85.86,74.54
  pour Bottom (isolate 0.4): 79.34,81.65 79.34,42.35 94.54,42.25 94.54,81.35 85.19,81.45
  pour Top (isolate 0.2, rank 2): 79.34,81.55 79.34,42.3 94.54,42.3 94.54,81.15 85.29,81.15
GPIO0
  Top 0.2: X1.12 25.68,65.09 R4.1 28.31,66.02 29.6,67.31 32.8,67.31 K1.3
GPIO2
  Top 0.2: R6.1 25.69,63.16 X1.11
GPIO4
  Top 0.2: JP5.3 36.59,55.02 35.99,55.6 35.99,63.22 36.16,63.62 36.26,63.95 36.26,68.76 35.08,69.92 29.39,69.93 26.58,67.12 X1.13
  Bottom 0.2: JP5.3 35.97,53.57 35.97,51.53 32.93,48.54 25.35,48.49 24.03,47.17 JP7.7
GPIO5
  Top 0.2: JP7.5 26.48,47.17 30.16,50.85 30.71,50.85 JP5.4 34.72,54.33 35.48,53.57 38,53.57 38.56,54.24 38.56,63.3 37.79,64 37.28,64.31 36.83,64.76 36.83,69.09 35.33,70.59 28.24,70.59 26.73,69.08 25.69,69.08 X1.14
GPIO14  (via drill 0.6)
  Top 0.2: v6.51,67.49 9.34,65.26 10.51,65.26 X1.5
  Bottom 0.2: v6.51,67.49 6.51,67.07 6.13,66.69 6.15,62.48 13.87,54.91 32.59,54.91 33.82,56.14 36,56.14 JP5.5 38.56,56.14 38.56,51.52 37.95,50.99 36,50.99 32.33,47.32 32.33,46.26 31.95,45.88 29.76,45.88 28.53,44.65 JP7.4
GPIO16  (via drill 0.6)
  Top 0.2: v7.29,69.16 9.2,67.11 X1.4 | v27.91,56.85 28.22,57.16 D2.2
  Bottom 0.2: v27.91,56.85 19.6,56.85 v7.29,69.16 6.55,69.16 5.52,68.13 5.53,61.87 13.46,54.39 16.53,54.19 19.59,50.91 19.59,43.99 20.3,43.28 29.72,43.28 JP7.2
N$1
  Bottom 0.152: C2.1 22.24,17.27 Y1.2 23.7,18.53 24.88,19.71 24.88,23.38 U1.9
N$2
  Top 0.152: 16.68,5.95 18.46,5.03 19.47,3.86 19.88,3.86 20.11,3.89 29.15,3.88 29.78,4.49 29.83,4.55 29.83,5.98 30.38,6.47 31.5,6.47 31.98,6.19 32.22,6.2 32.58,6.2 33.21,6.94 33.21,7.39 34.72,8.9 37.99,8.9 38.61,9.52 38.61,18.94 37.26,20.29 RF24.9 | 16.68,5.95 15.86,5.89 15.56,5.89 14.06,5.87 13.93,5.89 13.34,5.97 12.35,6 11.17,6 | 16.68,5.95 16.8,6.43 R1.P$2 | C4.1 10.37,7.23 11.17,6 | RESET.3 12.52,12.13 13.6,11.23 13.6,9.32 13.11,8.62 12.29,8.6 11.17,7.52 11.17,6
  Bottom 0.152: 3.55,9.76 2.12,9.76 1.41,10.47 1.41,16.56 2.22,17.38 3.34,17.38 4.36,18.39 4.36,23.24 U1.1 4.53,23.74 6.09,25.3 10.05,25.3 10.66,24.89 10.71,19.82 JP8.4 10.02,17.22 10.02,16.59 10.67,15.94 RESET.3
N$3
  Bottom 0.152: C1.1 28.58,14.85 Y1.1 28.1,19.09 27.42,20.22 27.42,23.38 U1.10
N$4
  Bottom 0.152: U1.16 33.12,33 31.97,33 31.41,32.37 31.41,29.55 33.86,26.93 33.86,21.48 34.72,20.62 RF24.10
N$5  (via drill 0.6)
  Top 0.152: v24.14,12.12 23.18,13.21 23.18,14.53 24.02,15.32 28.56,15.32 28.82,15.47 28.87,15.47 30.09,15.5 30.65,16.21 30.65,17.02 32.6,20.04 32.47,23.24 U1.12 31.41,25.13 31.41,32.79 31.64,33.1 31.64,34.8 30.47,35.97 27.02,36.07 24.58,38.41 12.55,38.41 JP2.4
  Bottom 0.152: v24.14,12.12 24.14,11.39 24.18,11.24 26.79,8.9 27.6,8.08 27.6,7.32 28.23,6.45 29.1,6.45 29.79,5.9 29.79,3.9 29.76,2.76 JP3.4
N$6  (via drill 0.6)
  Top 0.152: v22.15,20.76 21.64,20.19 20.08,18.9 arc-36 19.22,18.49 19.15,18.55 C5.1 | JP8.9 7.54,10.38 8.74,11.58 9.91,11.58 v11.37,9.98
  Bottom 0.152: U1.21 22.31,26.35 23.36,25.3 23.36,22.25 v22.15,20.76 | C5.1 14.07,18.61 14.54,18.14 14.54,10.52 14.11,10.09 v11.37,9.98
N$7  (via drill 0.6)
  Top 0.2: v28.95,73.35 27.42,73.47 26,73.47 X1.16
  Bottom 0.2: v28.95,73.35 4.12,73.42 1.46,69.83 1.46,53.71 2.13,53.04 JP1.5
N$8  (via drill 0.6)
  Top 0.2: v28.91,71.66 27.12,71.19 27.05,71.12 X1.15
  Bottom 0.2: v28.91,71.66 5.59,71.64 4.44,70.34 4.44,61.8 7.61,58.72 7.61,57.56 7.1,57.24 4.44,57.23 JP1.4
N$9  (via drill 0.6)
  Top 0.152: U1.14 37.55,24.32 36.57,25.3 34.74,25.3 33.92,24.49 33.92,22.05 33.24,21.11 33.24,20.24 31.05,16.94 31.05,15.42 30.8,15.12 29.1,15.12 28.23,14.45 28.23,13.51 25.19,10.67 21.78,10.62 21.07,9.81 v21.53,7.44
  Bottom 0.152: JP3.9 20.92,6 21,6.74 v21.53,7.44
N$10  (via drill 0.6)
  Top 0.152: v18.68,25.81 14.55,25.81 U1.4
  Bottom 0.152: JP3.2 31.27,1.33 | 31.27,1.33 32.41,1.96 32.41,5.67 D1.A | U1.4 12.05,28.01 10.66,29.67 10.66,32.21 10.02,32.79 8.65,32.79 7.61,33.94 7.61,36.17 8.61,37.17 JP2.2 | 31.27,1.33 27.76,1.32 27.23,2.02 27.22,7.89 26.07,9.04 24.78,9.22 17.5,15.8 17.44,17.35 18.38,18.29 18.71,18.67 18.68,19.46 v18.68,25.81
N$11
  Bottom 0.152: U1.23 17.23,30.41 18.28,29.36 18.28,27.94 17.77,27.43 17.77,25.4 18.28,24.89 18.28,22.15 17.67,21.64 16.96,21.64 16.04,20.93 16.04,20.12 16.6,19.36 16.68,12.32 18.68,10.62 22.62,10.62 24.04,9.3 24.04,7.42 24.69,6.65 24.69,4.43 JP3.6
N$12
  Bottom 0.152: U1.24 14.69,30.61 15.74,29.57 15.74,22.05 15.23,21.54 15.23,19.71 15.59,19.13 15.61,9.88 16.37,9.02 21.09,9.03 22.89,7.43 22.87,6.53 22.19,5.73 22.19,3.9 JP3.8
N$13
  Bottom 0.152: JP4.6 4.53,8.5 6.09,7.96 6.09,7.86 C4.2
N$14
  Bottom 0.152: U1.25 12.69,31.57 12.69,35.56 13.99,36.86 JP2.6
N$15
  Bottom 0.152: U1.26 7.22,33.69 7.1,33.81 7.1,37.49 8.12,38.51 15.19,38.51 JP2.8
N$16
  Bottom 0.152: U1.17 32.47,30.41 34.51,28.55 35.81,28.55 38.63,25.55 38.63,14.88 37.87,14.12 36,14.12 RF24.6
N$17
  Bottom 0.152: U1.5 14.69,19.54 15.05,19.08 15.1,11.1 15.15,9.55 16.19,8.41 16.24,7.35 17.05,6.54 19.62,5.11 19.65,4.42 20.92,3.18 JP3.10
N$18
  Bottom 0.152: JP4.5 3,11.04 4,12.09 | 4,12.09 4.03,14.76 5.46,16.34 5.46,18.46 6.19,19.22 7.62,19.21 7.99,19.64 7.99,21.12 9.61,22.73 U1.3 | JP8.8 8.07,11.59 5.5,11.59 4.97,12.09 4,12.09
N$19
  Bottom 0.152: JP4.4 2.79,14.23 4.05,15.5 4.05,17.17 4.82,17.98 4.82,18.72 JP8.1 6.85,23.18 U1.2
N$20
  Top 0.152: RF24.4 35.99,14.13 35.99,21.9 35.01,22.88 U1.13
N$21
  Top 0.152: JP3.5 24.59,6.52 23.79,6.5 21.15,6.48 20.41,7.16 20.41,8.21 19.65,9.2 16.12,9.2 15.13,10.16 15,12.47 14.06,13.92 13.83,14.12 4.11,14.12 3.39,14.86 1.79,14.86 1.51,15.14 1.51,29.06 3.48,31.03 U1.28 4.7,31.03 4.7,32.07 4.79,32.16 5.87,32.8 12.31,32.78 JP2.5
N$22  (via drill 0.6)
  Top 0.152: 10.96,26.11 7.48,29.6 7.07,29.6 U1.27 | 10.96,26.11 11.06,26.01 11.06,19.25 10.66,18.7 10.68,16.74 12.08,15.34 14.09,15.29 16.65,12.91 v16.5,10.64 | 10.96,26.11 13.2,28.35 15.43,28.35 16.14,28.96 16.14,33.02 16.53,33.45 JP2.7
  Bottom 0.152: JP3.7 23.42,7.58 21.33,9.45 17.39,9.45 v16.5,10.64
N$23
  Bottom 0.152: U1.19 27.39,27.51 28.62,26.28 28.62,21.97 33.91,16.68 35.98,16.68 RF24.5
N$24
  Top 0.152: D1.C 34.36,17.94 RF24.8
N$25  (via drill 0.6)
  Top 0.152: v22.29,9.76 25.06,9.76 28.44,12.8 31.76,12.8 32.99,11.58 35.45,11.58 36.73,12.86 RF24.3
  Bottom 0.152: U1.6 17.23,22.73 15.64,21.13 15.64,19.91 16.09,19.25 16.19,12.09 18.63,10.06 20.49,10.09 v22.29,9.76
N$26
  Bottom 0.152: U1.18 29.93,29.19 30.98,27.94 30.98,21.01 32.78,19.21 35.42,19.21 36.69,17.94 RF24.7
N$27
  Bottom 0.152: U1.15 37.24,31.03 35.45,32.82 34.64,32.82 30.27,37.19 20.89,37.69 JP2.10
N$28
  Top 0.152: JP2.9 25.98,34.63 26.71,35.36 30.47,35.36 31.18,34.65 31.18,33.35 30.95,33.12 30.95,24.61 U1.11
N$29  (via drill 0.6)
  Top 0.2: v7.06,65.47 9.37,63.32 10.45,63.32 X1.6
  Bottom 0.2: JP5.7 36.03,58.69 33.8,58.67 31.17,56.03 15.44,56.06 7.06,64.81 v7.06,65.47
N$30  (via drill 0.6)
  Top 0.2: v7.2,63.45 8.96,61.38 10.39,61.38 X1.7
  Bottom 0.2: JP5.6 33.58,57.52 31.55,55.49 14.74,55.49 v7.2,63.45
N$31
  Top 0.2: SJ1.3 24.39,49.04 23.76,48.44 22.81,48.48 22.2,47.82 22.2,46.46 22.7,45.91 24.32,45.91 24.4,45.83 25.89,44.63 JP7.6
N$32
  Top 0.2: SJ1.1 21.82,49.77 20.97,49.77 19.59,48.32 19.55,46.42 20.11,45.88 21.81,45.88 23.45,44.81 JP7.8
N$33
  Top 0.2: D2.1 31.94,57.16 JP5.8
N$34
  Top 0.2: K2.3 9.79,50.92 C9.1 5.53,54.06 5.33,56.3 5.33,65.16 2.88,67.35 2.79,68.82 2.65,69.28 2.64,73.27 3.58,73.99 R2.1 8.82,73.05 10.58,73.05 X1.1
N$35
  Top 0.2: R3.1 7.6,70.56 8.9,69.27 10.5,69.27 X1.3
N$36
  Top 0.4: D6.2 arc45 71.16,22.9 D5.4
N$37
  Top 0.4: D4.4 arc45 60.82,24.9 D5.2
N$38
  Top 0.4: D3.4 arc45 52.82,24.9 D4.2
N$39
  Top 0.4: D11.4 arc45 68.82,8.9 D12.2
N$40
  Top 0.4: D10.4 arc45 60.82,8.9 D11.2
N$41
  Top 0.4: D18.4 arc45 53.47,8.92 D10.2
N$42
  Top 0.4: D13.2 78.99,31.08 78.99,27.4 77.09,25.5 D6.4
N$43
  Top 0.4: D7.2 77.96,15.58 77.96,11.9 76.57,9.98 D12.4
N$44
  Top 0.4: D17.4 46.14,16.72 46.14,20.4 46.89,22.3 D3.2
N$45
  Top 0.4: D17.2 arc45 52.82,16.9 D9.4
N$46
  Top 0.4: D8.4 arc45 63.16,14.9 D9.2
N$47
  Top 0.4: D7.4 arc45 71.16,14.9 D8.2
N$48
  Top 0.4: D15.4 arc45 55.16,30.9 D16.2
N$49
  Top 0.4: D15.2 arc45 60.82,32.9 D14.4
N$50
  Top 0.4: D14.2 arc45 68.82,32.9 D13.4
N$51  (via drill 0.6)
  Top 0.4: D16.4 46.99,29.62 v46.23,29.61
  Bottom 0.4: R9.2 44.27,28.53 v46.23,29.61
N$52
  Top 0.4: 48.21,7.68 D18.2 49.56,6.23 49.54,2.24 51.06,1 55.01,0.89 56.01,2.32
  Top 0.406: 56.01,2.32 58.03,2.31 59.03,3.31 JP10.1
N$53
  Bottom 0.4: R7.1 46.09,26.2 R9.1 50.27,26.9 Q1.3
N$54
  Top 0.4: R10.2 80.25,12.14 JP14.1 SW1.2 | SW1.2 79.49,17.09 79.41,17.17 79.41,16.65 SW1.2
N$55
  Top 0.4: SW2.2 JP15.1 44.49,11.12 R11.2
N$56
  Top 2: U$2.1 57.76,54.96 JP17.1 | D19.2 55.54,44.79 JP19.1 57.72,44.8 U$4.1 62.63,47.89 62.63,52.48 60.3,54.96 U$2.1 | D20.2 55.4,66 JP18.1 57.87,65.12 U$3.1 60.02,65.12 62.59,62.44 62.59,57.97 U$2.1
N$57
  Top 2: Q3.3 59.88,70.58 arc-45 U$3.2 58.19,70.12 JP18.2 55.75,71.48 D20.1
N$58
  Top 2: D19.1 52.14,53.67 51.67,55.48 51.61,55.48 Q2.3 54.41,58.28 JP17.2 58.66,59.96 U$2.2
N$59
  Top 0.406: Q2.1 46.82,59.41 JP20.2 47.23,60.05 48.7,58.58 50.69,58.58 R12.1
N$60
  Top 0.4: 48.66,72.93 48.61,75.48 51.73,79.97 Q3.1
  Top 0.406: 48.66,72.93 48.66,67.17 JP21.2 52.07,63.76 R13.1
N$61
  Top 0.406: JP16.9 45.14,62.82 46.54,61.42 47.99,61.42 JP20.1
N$62
  Bottom 0.406: JP21.3 47.58,63.14 JP16.10
N$63
  Top 0.2: 43.8,66.65 46.08,66.65 45.99,66.51 45.99,64.32 45.79,64.1 43.35,64.09
  Top 0.406: JP16.6 47.26,67.78 46.08,66.65 | 43.8,66.65 43.27,66.07 43.27,61.06 JP20.3
N$64
  Bottom 0.406: JP21.1 50.12,68.22 JP16.8
N$65
  Top 0.4: JP24.1 94.79,34.68 94.79,27.85 93.06,26.12 JP23.1 91.54,23.15 91.54,20.5 90.24,19.2 86.29,19.2 84.94,17.85 84.94,12.75 85.51,12.18 U2.3 86.78,8.56 C26.1
  Bottom 0.4: F1.2 92.84,24.95 JP23.1
N$66
  Bottom 0.4: J1.1 85.6,13.99 84.74,14.85 84.74,18.25 85.39,18.9 89.59,18.9 91.04,20.35 91.04,26.5 91.09,30 91.84,30.35 F1.1
N$67
  Top 0.2: 68.84,62.82 JP25.9 68.72,60.44 R17.1 69.42,59.31 69.94,58.79 74.36,58.79 74.68,58.47 74.68,55.57 K3.2
N$68
  Top 0.2: D21.A 76.38,50.25 76.37,56.79 75.33,57.83 R16.2
N$69
  Top 0.2: R16.1 71.66,62.17 JP25.10
N$70
  Top 0.2: U$7.2 73.13,70.31 72.72,69.9 72.69,69.63 JP25.6
N$71
  Top 0.2: R15.1 71.29,65.33 JP25.8 69.98,64.06 69.98,61.33 R14.2 C28.2
N$72
  Top 0.2: R15.2 75.54,64.78 JP26.1
N$73
  Bottom 0.8: JP31.1 84.04,56.75 79.79,61 79.79,69 80.28,69 JP27.3
N$74
  Top 0.2: JP31.2 81.53,51.65 JP30.1 | 86.94,61.4 86.84,61.65 IC1.5
  Top 0.8: JP31.2 86.04,54.16 | 86.04,54.16 89.87,54.16 L1.2 | 86.04,54.16 86.14,54.26 86.14,57.2 84.95,58.39 C31.2 84.95,60.16 86.14,61.2 86.39,61.4 86.94,61.4
N$75
  Top 0.2: JP30.2 80.94,54.35 82.49,55.9 82.49,59.2 86.19,62.9 86.19,63 IC1.4
N$76
  Top 0.2: JP27.10 80.94,59.5 JP30.3
N$77
  Top 0.2: 89.29,60.3 89.39,60.3 IC1.1
  Top 0.8: D22.A 94.21,66.7 94.21,60.75 92.96,59.42 L1.1 89.84,60.38 89.84,61.4 89.29,61.4 89.29,60.3
N$78
  Top 0.8: U$8.1 89.39,73.8 | JP28.1 89.14,73.8 89.39,73.8 | D22.C 93.69,69.44 R18.2 C29.2 | C30.2 87.19,69.44 C29.2 | C29.2 89.39,73.8
N$79
  Top 0.2: IC1.3 89.29,63.6 89.29,64.3
  Top 0.8: C29.1 89.08,66.95 R19.2 89.08,63.85 | 89.29,64.3 89.64,64.3 89.64,63.75 89.08,63.75 89.08,63.85 | TM1.2 91.89,62.25 91.89,63.85 89.08,63.85
N$80
  Top 0.8: U$9.1 89.09,45 JP29.1 87.09,47 86.24,47 84.04,49.2 JP31.3
N$81
  Top 0.8: TM1.3 91.14,66.96 R18.1
SPI_CS  (via drill 0.6)
  Top 0.2: v31.43,62.44 v31.44,62.45 31.14,62.15 29.34,62.15 28.34,61.15 R5.1 25.68,61.15 X1.10
  Bottom 0.2: JP5.9 35.67,64.07 33.49,64.07 31.87,62.45 v31.44,62.45
VCC  (1 unrouted)
  Top 0.152: U1.20 22.17,28.35 20.31,28.35 19.77,27.81 U1.7 19.64,23.41 C7.1 | 24.92,31.03 24.92,31.13 26.51,32.82 | 26.51,32.82 28.13,32.82 29.45,34.14 29.93,34.14 C6.1 | 4.26,17.59 JP4.3 | 30.99,9.9 29.92,8.83 C3.1 29.22,7.49 28.53,6.49 JP3.3 28.51,6.63 28.51,6.73 26.41,8.84 25.01,8.84 | 26.51,32.82 26.41,32.82 18.79,32.82 17.77,33.83 17.77,35.16 17.06,35.87 12.69,35.87 JP2.3 | 6.85,12.85 JP8.7 6.87,12.78 8.12,11.53 | JP8.3 7,17.86 8.1,16.68 9.82,16.68 10.07,16.61
  pour Top (isolate 0.254): 35.61,-0.1 3.99,-0.1 arc-90 -0.01,3.9 -0.01,35.52 arc-90 3.99,39.52 35.61,39.52 arc-90 39.61,35.52 39.61,3.9 arc-90
VCC1  (via drill 0.6)
  Top 0.2: R2.2 4.36,71.38 4.3,71.32 4.3,69.83 R3.2 5.63,66.75 6.24,65.79 6.24,62.34 7.47,61.56 8.6,59.42 | 8.6,59.42 9.27,59.42 | JP5.2 32.72,50.32 31.75,50.32 28.6,47.17 JP7.3 27.25,45.89 25.39,45.89 24.73,46.6 24.73,47.8 26.54,49.63 26.54,51.65 24.4,52.67 | 24.4,52.67 12.09,52.7 8.99,55.46 C8.1 8.97,58.97 9.27,59.27 9.27,59.42 | 24.4,52.67 24.49,53.83 24.67,55.12 28.54,58.96 30.94,58.96 32.87,60.92 32.87,64.1 31.7,65.09 R4.2 R6.2 | v6.65,58.2 8.15,59.51 8.6,59.42 | 9.27,59.42 10.35,59.42 X1.8
  Bottom 0.2: JP1.3 6.93,58.12 v6.65,58.2
VDD  (via drill 0.6)
  Bottom 0.4: v46.45,24.16 45.15,25.2 R7.2
  pour Top (isolate 0.4): 42.49,39.4 42.49,0.4 81.49,0.4 81.49,39.4 59.99,39.4
VDD1
  pour Top: 84.34,39.55 84.34,0.3 95.44,0.3 95.44,39.15 90.29,39.15
VDD2
  pour Top (isolate 0.4): 66.09,81.8 66.09,42.1 76.79,42.1 76.79,81.5 71.69,81.5
VSS  (via drill 0.6)
  Top 0.4: v53.08,3.28 52.74,5.65 | 52.74,5.65 52.57,5.82 D18.3 | v61.35,5.73 60.66,6.2 | 60.66,6.2 D10.3 | v69.55,3.56 69.64,5.92 | 69.64,5.92 69.47,6.09 D11.3 | v50.83,34.72 49.41,33.54 D16.3 49.59,31.32 C23.1 | v72.14,34.57 71.99,34.08 D13.3 72.09,31.22 C25.1 | v47.49,19.9 47.41,18.82 D17.3 51.39,14.62 C18.2 | C10.2 52.77,5.31 52.74,5.65 | 60.66,6.2 59.65,6.03 56.65,5.97 56.12,5.44 C11.2 | C12.2 69.59,5.08 69.64,5.92 | C13.2 73.89,5.22 D12.3 76.99,7.38 v77.99,7.9 78.45,8.36 R10.1 | C21.2 73.89,14.52 D7.3 70.49,19.08 v69.99,19.9 69.47,20.4 D5.3 66.39,20.12 C15.1 | C20.2 66.39,14.52 D8.3 63.41,18.82 v62.99,19.9 62.97,19.9 D4.3 58.89,20.02 C16.1 | C19.2 58.89,14.62 D9.3 55.41,18.82 v54.99,19.9 55.47,19.4 D3.3 51.39,20.02 C17.1 | D6.3 75.77,21.28 75.69,21.2 | 75.69,21.2 C14.1 | v76.49,19.9 76.49,20.4 75.69,21.2 | C24.1 57.59,30.82 D15.3 55.71,34.68 JP9.1 54.99,36.71 55.73,37.45 63.1,37.45 JP12.2 65.05,35.3 65.05,34.15 63.6,32.7 D14.3 64.59,31.22 C22.1 | R11.1 v45.3,8.55 | 57.51,27.46 55.47,27.46 v55.44,27.43
  pour Bottom (isolate 0.4): 42.49,39.4 42.49,0.4 81.49,0.4 81.49,39.4 57.99,39.4

## Text on the board
tPlace: PORT B | 10 | 1 | C6 | 28 | ATMEGA328P | 1 | GND | 1 | X1 | D10 | RST | WIFI | C5 | C7 | CTS | VCC | RX | C4 | C3 | D1 | TX | RESET | VREF | GND | R1 | C1 | RADIO | DTR | C2 | 1 | 10 | PORT A
bPlace: A2 | 2 | 2 | D2 | A1 | 1 | D1 | 1 | Vin | D2 | D6 | A2 | A3 | D9 | C1 - C2 = 22pF | C3 - C7 = 0.1uF | R1 = 10k Ohm | X1 = 8MHz | GND | VCC | A5 | A4 | D5 | VCC: 2.4V - 3.6V | D8 | A4 | A5 | VCC | GND | D3 | A1 | A0 | D6 | D2
tNames: VOUT | VIN | GND | VDD | DIN | 5V | GND | 5V | VDD | DOUT | 5V | GND